# Altium PCB SD_Loger.PcbDoc
Units mm, origin at the board's own origin, x right, y up, seen from the top; angles counter-clockwise.
Board outline 30.35 x 38.75 mm, 2 copper layers (Top Layer, Bottom Layer); 36 components, 29 nets, 163 pads, 31 vias.
Unrouted connection lines stored in the file: 35.
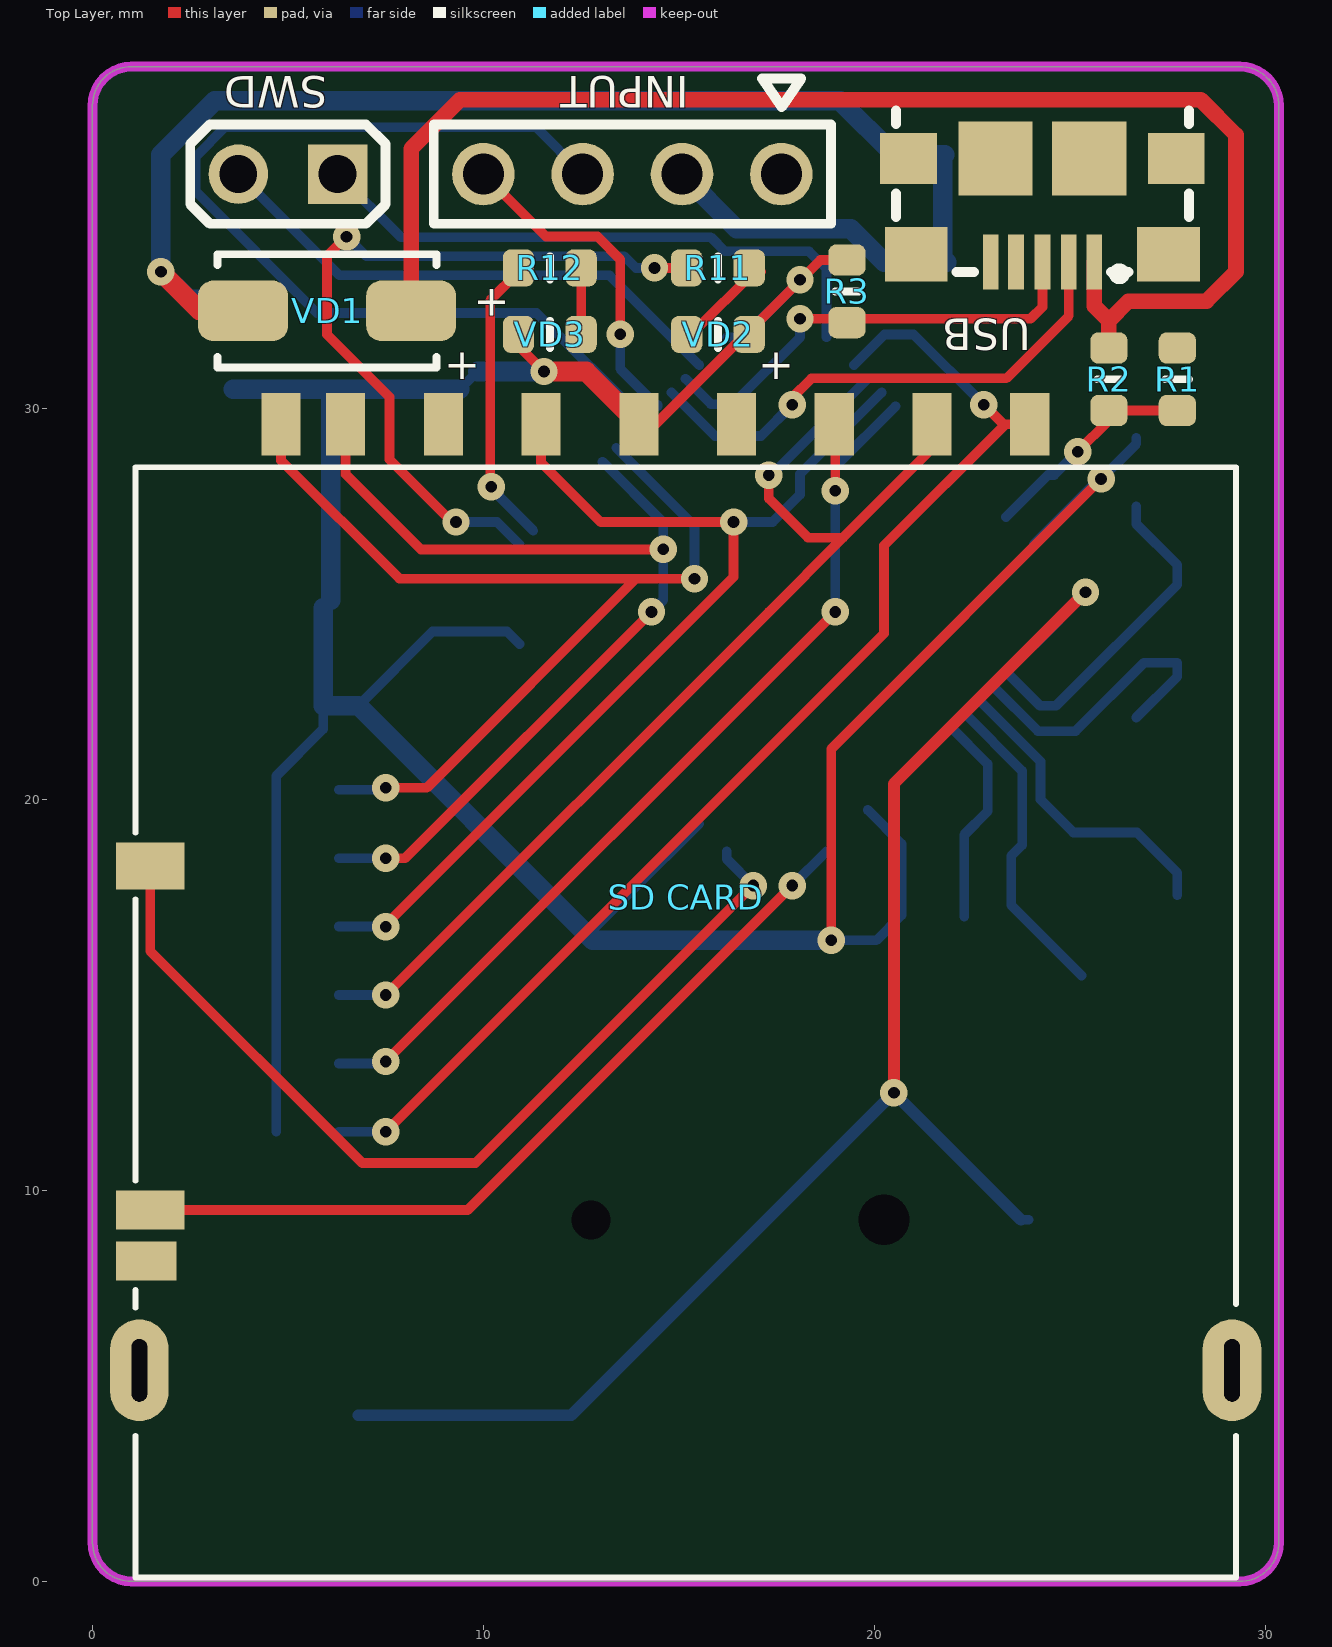
[diagram p0: Top Layer view]
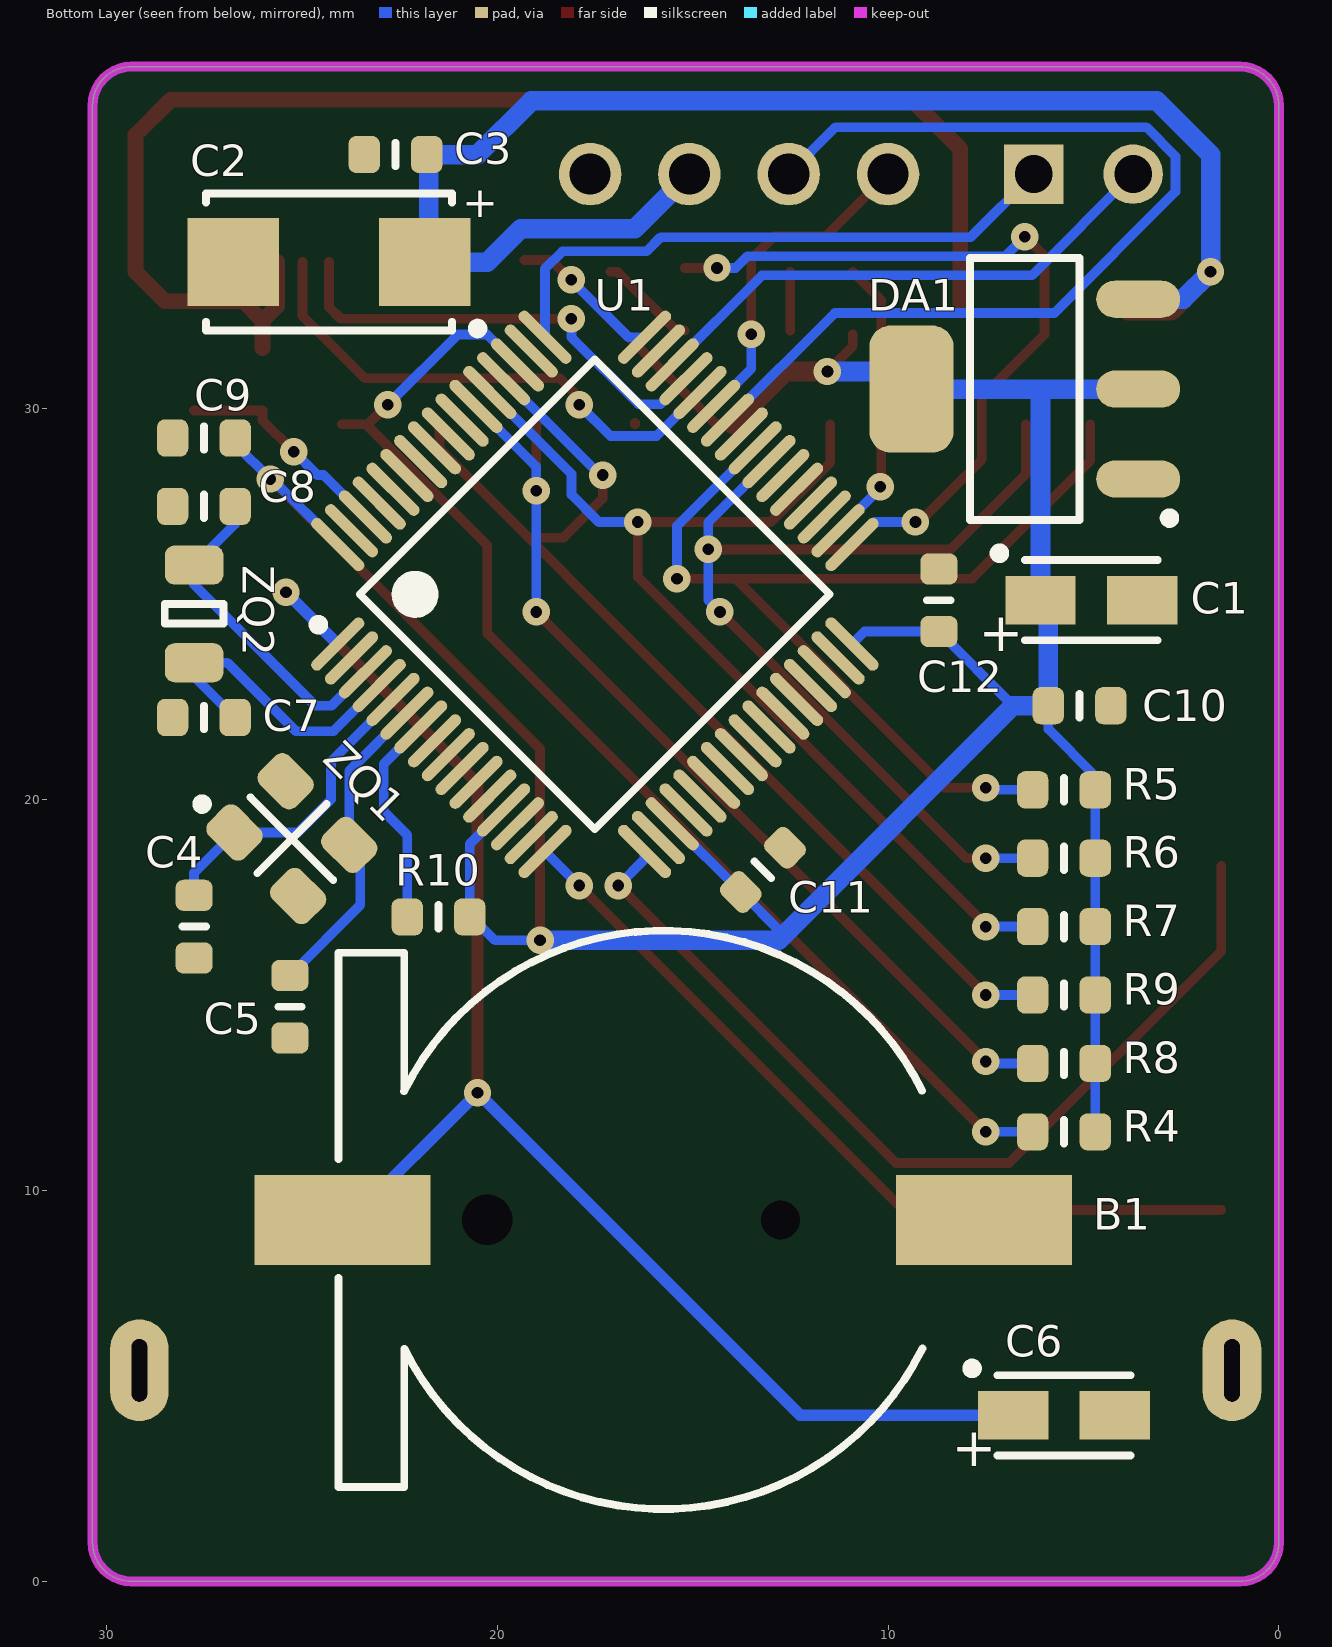
[diagram p1: Bottom Layer view, seen from below]
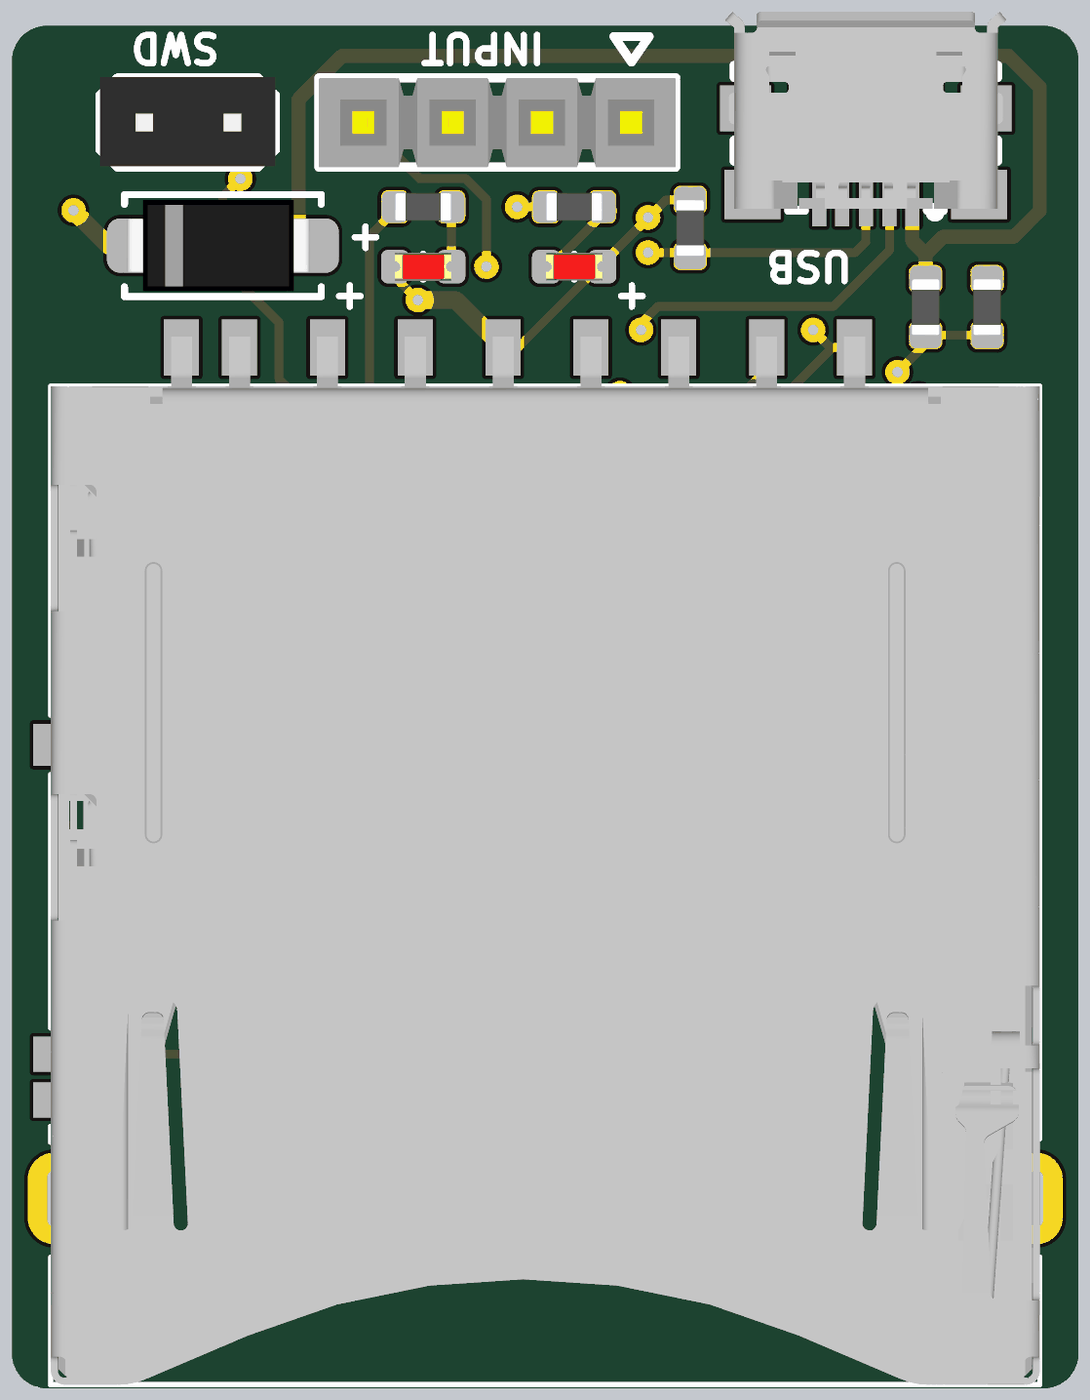
[diagram p2: 3D render of the assembled board from above, using the file's embedded part models]
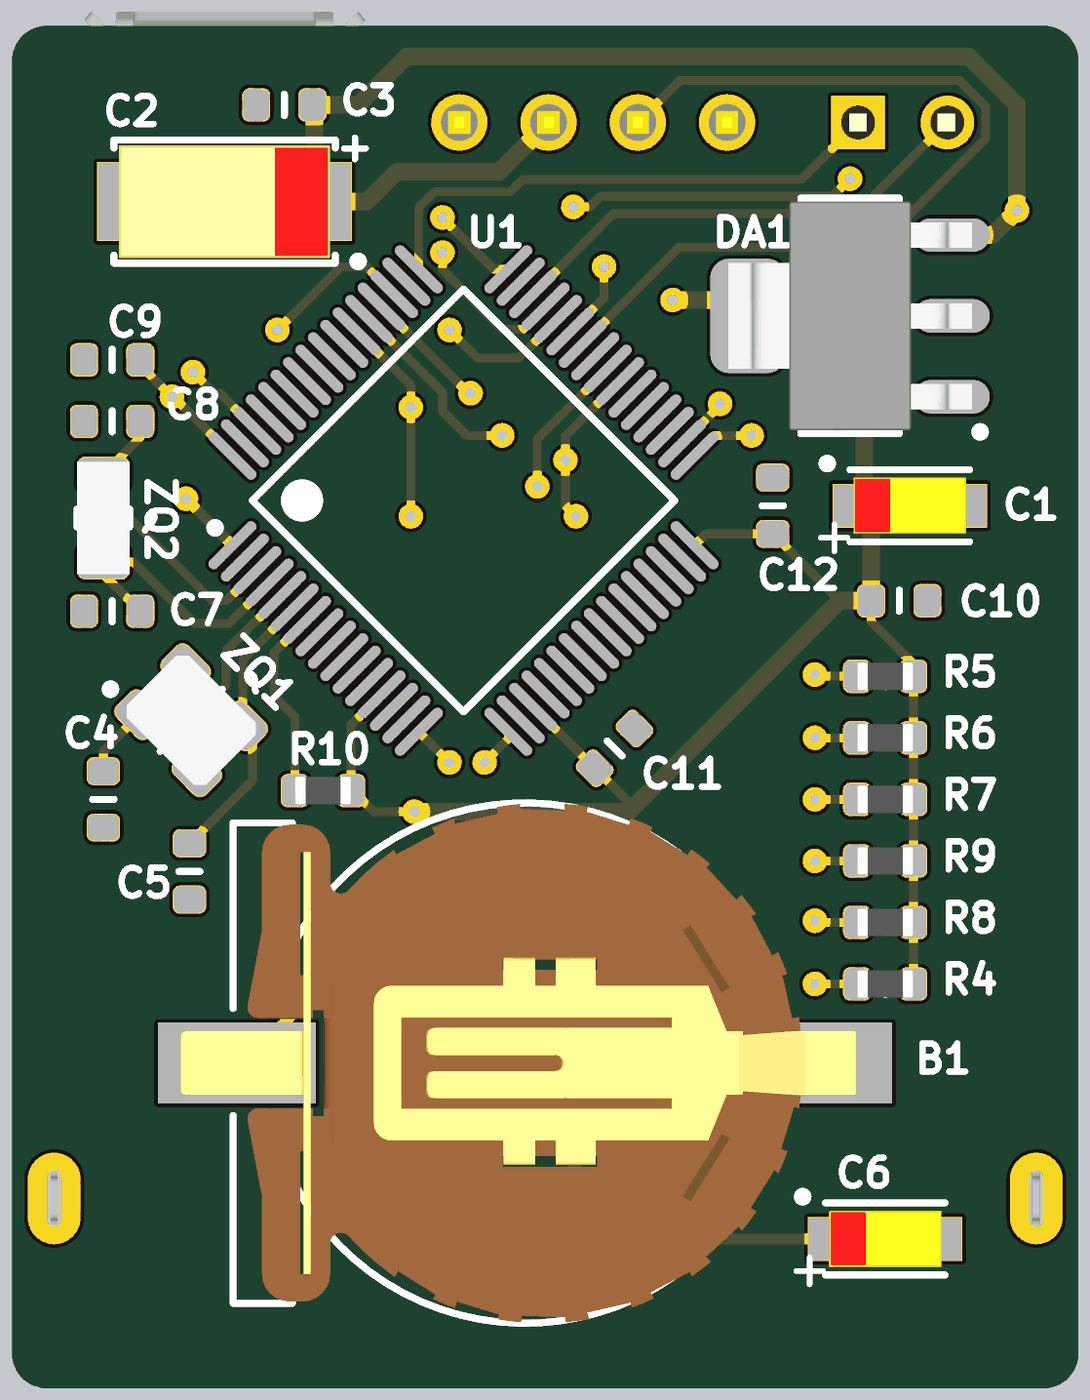
[diagram p3: 3D render of the assembled board from below, using the file's embedded part models]

## Layer stack, top to bottom
Top Solder: solder mask 0.0102, Solder Resist, Dk 3.5
Top Layer: signal copper 0.0356
Dielectric 1: dielectric 0.32, FR-4, Dk 4.8
Bottom Layer: signal copper 0.0356
Bottom Solder: solder mask 0.0102, Solder Resist, Dk 3.5

## Board outline
0,1 ccw(c1,1) 1,0 29.35,0 ccw(c29.35,1) 30.35,1 30.35,37.75 ccw(c29.35,37.75) 29.35,38.75 1,38.75 ccw(c1,37.75) 0,37.75

## Design rules (kind name [scope] priority, off if disabled: settings)
Clearance [All] p1: gap=0.2
ComponentClearance [All] p1: gap=0.05 collisioncheckmode=3 verticalgap=0.05 showdistances=FALSE
PolygonConnect [All] p1: connectstyle=Relief reliefconductorwidth=0.25 reliefentries=4 polygonreliefangle="45 Angle" airgapwidth=0.25
RoutingVias [All] p1: holewidth=0.3 width=0.7 viastyle="Through Hole" minholewidth=0.3 minwidth=0.7 maxholewidth=0.3 maxwidth=0.7
SMDNeckDown [All] p1: percent=90.000
SolderMaskExpansion [All] p1: expansion=0.102
Width [All] p1: maxlimit=1 minlimit=0.25 preferedwidth=0.25
29 further rules are at their usual default settings.

## Components (designator, comment, footprint, x,y, rotation, side; value= is the part's Value field where it differs from the comment)
B1 "CR1220" S8411-45R 15.75,9.25 r270 bottom
C1 "Tantal A 10uF/16V" "CAPMP3216X180N (TANTAL A)" 4.8,25.1 r180 bottom
C2 "Tantal C 47uF/16V" "CAPMP6033X250N (TANTAL C)" 24.3,33.75 r0 bottom
C3 "чип 0603 1uF/50V," CAPC1608X50(0603) 22.6,36.5 r180 bottom
C4 "чип 0603 10pF/50V," CAPC1608X50(0603) 27.75,16.75 r270 bottom
C5 "чип 0603 10pF/50V," CAPC1608X50(0603) 25.3,14.7 r90 bottom
C6 "Tantal A 10uF/16V" "CAPMP3216X180N (TANTAL A)" 5.5,4.25 r180 bottom
C7 "чип 0603 20pF/50V," CAPC1608X50(0603) 27.5,22.1 r180 bottom
C8 "чип 0603 20pF/50V," CAPC1608X50(0603) 27.5,27.5 r180 bottom
C9 "чип 0603 100nF/50V," CAPC1608X50(0603) 27.5,29.25 r180 bottom
C10 "чип 0603 100nF/50V," CAPC1608X50(0603) 5.1,22.4 r0 bottom
C11 "чип 0603 100nF/50V," CAPC1608X50(0603) 13.2,18.2 r315 bottom
C12 "чип 0603 100nF/50V," CAPC1608X50(0603) 8.7,25.1 r270 bottom
DA1 "AMS1117-3.3" SOT230P700X180-4N(SOT223)_NUM 6.5,30.5 r0 bottom
INPUT "DS1021-1x4" HDRV4P254_1x4 10,36 r0 top
R1 "чип 0603 10K 5%" RESC1608X45(0603) 27.75,30.75 r270 top
R2 "чип 0603 5.9K 5%" RESC1608X45(0603) 26,30.75 r90 top
R3 "чип 0603 1K 5%" RESC1608X45(0603) 19.3,33 r270 top
R4 "чип 0603 10K 5%" RESC1608X45(0603) 5.5,11.5 r180 bottom
R5 "чип 0603 10K 5%" RESC1608X45(0603) 5.5,20.25 r180 bottom
R6 "чип 0603 10K 5%" RESC1608X45(0603) 5.5,18.5 r180 bottom
R7 "чип 0603 10K 5%" RESC1608X45(0603) 5.5,16.75 r180 bottom
R8 "чип 0603 10K 5%" RESC1608X45(0603) 5.5,13.25 r180 bottom
R9 "чип 0603 10K 5%" RESC1608X45(0603) 5.5,15 r180 bottom
R10 "чип 0603 10K 5%" RESC1608X45(0603) 21.5,17 r0 bottom
R11 "чип 0603 1.5K 5%" RESC1608X45(0603) 16,33.6 r0 top
R12 "чип 0603 1.5K 5%" RESC1608X45(0603) 11.7,33.6 r0 top
"SD CARD" "Attend" "Attend 104H-TDA0-R01" 1.1,0.1 r0 top
SWD "DS1021-1x2" HEADER-2.54P-2N 5,36 r270 top
U1 "STM32F103RBT6" LQFP64_N 17.5,25.25 r135 bottom
USB "1981568-1" "USB MICRO-B" 24.3,36.4 r180 top
VD1 "(SMA)" "DIOM5226X267N (SMA)" 6,32.5 r0 top
VD2 "чип 0603 LED (RED)" LEDC1608X80N(0603)_red 16,31.9 r0 top
VD3 "чип 0603 LED (RED)" LEDC1608X80N(0603)_red 11.7,31.9 r180 top
ZQ1 "KX-7T-12.88662 12MHz(8MHz)" XTAL320X250X78-4N(ADM8) 25.25,19 r225 bottom
ZQ2 "DST310S(32.768 KHz)" XTAL320X150X90-2N(DST) 27.75,24.75 r270 bottom

## Footprints (in the part's own frame and the unit in brackets; to place one, negate y for a bottom-side part, rotate by r counter-clockwise, add the part's x,y. Pads: shape width x height; smd on the part's side, far side on the other; paste and mask are expansions set on the pad)
"Attend 104H-TDA0-R01" [mm]
  rect 1x1.6 smd: 1(20.375,29.5) 2(17.875,29.5) 3(15.375,29.5) 4(12.875,29.5) 5(10.375,29.5) 6(7.875,29.5) 7(5.375,29.5) 8(3.725,29.5) 9(22.875,29.5)
  rect 1.75x1.2 smd: 10(0.375,18.2)
  rect 1.75x1 smd: 11(0.375,9.4)
  rect 1.55x1 smd: 12(0.275,8.1)
  oval 1.5x2.6 hole 0.4 slot 1.6 at 90 deg: 13(0.1,5.3) 14(28.05,5.3)
  silkscreen extent 0,0 28.15,28.4, body extent 0,0 28.15,29.81, height 2.75
CAPC1608X50(0603) [mm]
  rrect50% 0.8x0.95 smd paste-0.025: 1(-0.8,0) 2(0.8,0)
  silkscreen extent 0,-0.3 0,0.3, body extent -0.8,-0.4 0.8,0.4, height 0.5
"CAPMP3216X180N (TANTAL A)" [mm]
  rect 1.8x1.25 smd paste-0.025: 1(-1.3,0) 2(1.3,0)
  silkscreen extent -2.48,-1.03 1.7,1.32, body extent -1.6,-0.8 1.6,0.8, height 1.8
"CAPMP6033X250N (TANTAL C)" [mm]
  rect 2.35x2.25 smd paste-0.025: 1(-2.45,0) 2(2.45,0)
  silkscreen extent -3.92,-1.75 3.15,1.82, body extent -3,-1.6 3,1.6, height 2.5
"DIOM5226X267N (SMA)" [mm]
  rrect50% 2.3x1.55 smd: A(2.15,0) C(-2.15,0)
  silkscreen extent -2.8,-1.45 2.8,1.45, body extent -2.73,-1.3 2.47,1.3, height 2.4
HDRV4P254_1x4 [mm] "PLS4"
  round 1.6 hole 1.05: 1(7.62,0) 2(5.08,0) 3(2.54,0) 4(0,0)
  silkscreen extent -1.27,-1.27 8.89,2.45, body extent -1.27,-1.27 8.89,1.27, height 8.14
HEADER-2.54P-2N [mil]
  rect 60x60 hole 38: 1(0,50)
  round 60 hole 38: 2(0,-50)
  silkscreen extent -50,-98 50,98, body extent -51,-98 49,98, height 335
LEDC1608X80N(0603)_red [mm]
  rrect50% 0.8x0.95 smd: A(0.8,0) C(-0.8,0)
  silkscreen extent 0,-0.35 0,0.35, body extent -0.81,-0.4 0.81,0.4, height 0.6
LQFP64_N [mm] "Thin QFP, 64-Leads, Body 10x10mm, Pitch 0.5mm, IPC Medium Density"
  oval 1.8x0.3 smd: 1(-5.55,3.75) 2(-5.55,3.25) 3(-5.55,2.75) 4(-5.55,2.25) 5(-5.55,1.75) 6(-5.55,1.25) 7(-5.55,0.75) 8(-5.55,0.25) 9(-5.55,-0.25) 10(-5.55,-0.75) 11(-5.55,-1.25) 12(-5.55,-1.75) 13(-5.55,-2.25) 14(-5.55,-2.75) 15(-5.55,-3.25) 16(-5.55,-3.75) 33(5.55,-3.75) 34(5.55,-3.25) 35(5.55,-2.75) 36(5.55,-2.25) 37(5.55,-1.75) 38(5.55,-1.25) 39(5.55,-0.75) 40(5.55,-0.25) 41(5.55,0.25) 42(5.55,0.75) 43(5.55,1.25) 44(5.55,1.75) 45(5.55,2.25) 46(5.55,2.75) 47(5.55,3.25) 48(5.55,3.75)
  oval 0.3x1.8 smd: 17(-3.75,-5.55) 18(-3.25,-5.55) 19(-2.75,-5.55) 20(-2.25,-5.55) 21(-1.75,-5.55) 22(-1.25,-5.55) 23(-0.75,-5.55) 24(-0.25,-5.55) 25(0.25,-5.55) 26(0.75,-5.55) 27(1.25,-5.55) 28(1.75,-5.55) 29(2.25,-5.55) 30(2.75,-5.55) 31(3.25,-5.55) 32(3.75,-5.55) 49(3.75,5.55) 50(3.25,5.55) 51(2.75,5.55) 52(2.25,5.55) 53(1.75,5.55) 54(1.25,5.55) 55(0.75,5.55) 56(0.25,5.55) 57(-0.25,5.55) 58(-0.75,5.55) 59(-1.25,5.55) 60(-1.75,5.55) 61(-2.25,5.55) 62(-2.75,5.55) 63(-3.25,5.55) 64(-3.75,5.55)
  silkscreen extent -5.67,-4.25 4.25,4.57, body extent -5,-5 5,5, height 1.6
RESC1608X45(0603) [mm]
  rrect50% 0.8x0.95 smd paste-0.025: 1(-0.8,0) 2(0.8,0)
  silkscreen extent 0,-0.3 0,0.3, body extent -0.8,-0.4 0.8,0.4, height 0.5
S8411-45R [mm]
  rect 2.3x4.5 smd: 1(0,-8.2) 2(0,8.2)
  round 1.2 hole 1.3 unplated: ""(0,-4.5)
  round 0.9 hole 1 unplated: ""(0,3)
  silkscreen extent -7.4,-8.31 7.4,6.63, body extent -7.37,-9.79 7.37,9.41, height 4.25
SOT230P700X180-4N(SOT223)_NUM [mm]
  oval 2.15x0.95 smd: 1(-2.9,2.3) 2(-2.9,0) 3(-2.9,-2.3)
  rrect50% 2.15x3.25 smd: 4(2.9,0)
  silkscreen extent -3.82,-3.35 1.4,3.42, body extent -3.47,-3.25 3.47,3.25, height 1.64
"USB MICRO-B" [mm] "Micro USB B Tyco  1981568-1"
  rect 0.4x1.4 smd: 1(-1.325,2.65) 2(-0.675,2.65) 3(0,2.65) 4(0.675,2.65) 5(1.325,2.65)
  rect 1.45x1.3 smd: SHLD(-3.425,0) SHLD(3.425,0)
  rect 1.6x1.4 smd: SHLD(-3.225,2.45) SHLD(3.225,2.45)
  rect 1.9x1.9 smd: SHLD(-1.2,0) SHLD(1.2,0)
  silkscreen extent -3.75,-1.23 3.75,3.12, body extent -4,-2.75 4,2.85, height 2.79
XTAL320X150X90-2N(DST) [mm]
  rrect50% 1x1.5 smd paste-0.025 mask+0.1: 1(-1.25,0) 2(1.25,0)
  silkscreen extent -0.25,-0.75 0.25,0.75, body extent -1.6,-0.75 1.6,0.75, height 0.9
XTAL320X250X78-4N(ADM8) [mm]
  rrect50% 1.3x1.05 smd paste-0.025 mask+0.1: 1(-1.15,-0.925) 2(1.15,-0.925) 3(1.15,0.925) 4(-1.15,0.925)
  silkscreen extent -2.37,-1.25 1.5,1.25, body extent -1.6,-1.25 1.6,1.25, height 0.7

## Part data
B1: "CR-1220 Battery Holder"
C1 C6: library part "Tantalum Size A", "Tantalum Size A"
C2: library part "Tantalum Size C", "Tantalum Size C"
C3 C4 C5 C7 C8 C9 C10 C11 C12: library part C0603, "C0603"
DA1: library part AMS1117, "AMS1117 Voltage Regulation"
INPUT: library part Header-2.54P-4N, "IDC разъем 4 контактов. Шаг 2.54мм"
R1 R2 R3 R4 R5 R6 R7 R8 R9 R10 R11 R12: library part R0603, "R0603"
"SD CARD": library part "MicroSD Attend", "Attend 104H-TDA0-R01"
SWD: library part Header-2.54P-2N, "IDC разъем 2 контакта"
U1: "STM32 ARM-based 32-bit MCU with 128 Kbytes Flash, 64-pin LQFP, Industrial Temperature"
USB: library part "USB Micro-B Tyco", "USB micro type A. SMT (TE 1981568-1)"
VD1: library part "SMA Standart", "SMA General Pupose Diode"
VD2 VD3: library part "LED 0603", "LED 0603"
ZQ1: library part "XTAL, SMD, 3.2mm x 2.5mm, 4 pads", "KX-7T series"
ZQ2: library part "XTAL, SMD, 3.2mm x 1.5mm, 2 pads", "DST310S"

## Via types
v1: diameter 0.7, hole 0.3, Top Layer to Bottom Layer, 31 vias

## Nets (pads, with @x,y where several pads share a name; then routed paths per layer and width w, separated by ;. In a path a pad name is that pad's centre, name@x,y a point inside that pad or via, vN(x,y) a via of type N, cw(c..) or ccw(c..) an arc to the next point about the centre after c; other vN are vias at no path point)
3.3V: "SD CARD.4" C1.1 C9.2 C10.2 C11.2 C12.2 DA1.2 DA1.4 R3.1 R4.2 R5.2 R6.2 R7.2 R8.2 R9.2 R10.1 U1.13 U1.19 U1.32 U1.48 U1.64 VD2.A VD3.A | length 89.7
  Top Layer w0.25: VD3.A 10.9,31.6 v1(11.55,30.95) ; 13.975,29.6 14.4,29.6 16.8,32 16.817,32 v1@18.1,33.283 ; v1(18.1,33.3) v1@18.1,33.283 ; v1(18.9,16.4) 18.9,21.3 v1(25.8,28.2) ; R3.1 18.617,33.8 v1@18.1,33.283
  Top Layer w0.5: v1(11.55,30.95) 12.625,30.95 13.975,29.6
  Bottom Layer w0.25: R4.2 R8.2 R9.2 R6.2 R5.2 4.7,20.6 5.9,21.8 C10.2 ; C1.1@5.9,24.9 C1.1 ; 6.8,22.4 C12.2 10.601,24.3 U1.32 ; DA1.4 DA1.4@9.85,30.95 ; 12.6,16.6 12.731,16.6 C11.2 15.512,19.381 U1.19 ; U1.48 16.644,31.826 18.1,33.283 v1(18.1,33.3) ; v1(18.9,16.4) 20.05,16.4 20.7,17.05 20.7,18.868 U1.13 ; U1.64 25.753,28.2 v1(25.8,28.2) 26.7,29.1 C9.2
  Bottom Layer w0.5: DA1.2 6.1,30.5 ; C1.1@5.9,24.9 C10.2 6.8,22.4 12.6,16.6 12.8,16.4 v1(18.9,16.4) ; C1.1 6.1,30.5 ; DA1.4 6.1,30.5 ; DA1.4@9.85,30.95 v1(11.55,30.95)
CD/DATA3: "SD CARD.1" R9.1 U1.52 | length 28.1
  Top Layer w0.25: v1(7.5,15) 17.3,24.8 19.2,26.7 ; v1(17.3,28.3) 17.3,27.7 18.3,26.7 19.2,26.7 ; 21.475,29.6 21.475,28.975 19.2,26.7
  Bottom Layer w0.25: R9.1 v1(7.5,15) ; v1(17.3,28.3) 17.368,28.3 U1.52
D+: R3.2 U1.45 USB.3 | length 11.9
  Top Layer w0.25: v1(18.1,32.3) 24,32.3 24.3,32.6 USB.3
  Bottom Layer w0.25: U1.45 15.818,30.114 16.389,30.114 18.1,31.825 v1(18.1,32.3)
D-: U1.44 USB.2 | length 13.4
  Top Layer w0.25: v1(17.9,30.1) 17.9,30.285 18.39,30.775 23.375,30.775 24.975,32.375 USB.2
  Bottom Layer w0.25: U1.44 15.925,29.3 17.1,29.3 v1(17.9,30.1)
DATA0: "SD CARD.7" R6.1 U1.39 | length 25.4
  Top Layer w0.25: 6.475,29.6 6.475,28.325 8.4,26.4 v1(14.6,26.4) ; v1(7.5,18.5) 8,18.5 v1(14.3,24.8)
  Bottom Layer w0.25: R6.1 v1(7.5,18.5) ; U1.39 14.6,27.089 v1(14.6,26.4) 14.6,25.1 v1(14.3,24.8)
DATA1: "SD CARD.8" R5.1 U1.40 | length 26.8
  Top Layer w0.25: 4.825,29.6 4.825,28.675 7.85,25.65 13.9,25.65 ; v1(7.5,20.3) 8.55,20.3 13.9,25.65 ; v1(15.4,25.65) 13.9,25.65
  Bottom Layer w0.25: R5.1 7.45,20.25 v1(7.5,20.3) ; U1.40 15.4,26.996 v1(15.4,25.65)
DATA2: "SD CARD.9" R4.1 U1.51 | length 32.3
  Top Layer w0.25: v1(7.5,11.5) 20.25,24.25 20.25,26.5 23.35,29.6 23.975,29.6 23.3,29.6 v1(22.8,30.1)
  Bottom Layer w0.25: R4.1 v1(7.5,11.5) ; U1.51 20.261,31.9 21,31.9 v1(22.8,30.1)
GND: "SD CARD.3" "SD CARD.6" "SD CARD.12" "SD CARD.13" "SD CARD.14" B1.2 C1.2 C2.2 C3.1 C4.2 C5.1 C6.2 C7.1 C8.1 C9.1 C10.1 C11.1 C12.1 DA1.1 INPUT.1 R1.1 U1.12 U1.18 U1.31 U1.47 U1.60 U1.63 USB.5 USB.SHLD ZQ1.2 ZQ1.4 | length 0
  Top Layer w0.25: 16.475,29.6 16.475,29.63
NetB1_1: B1.1 C6.1 U1.1 | length 38.6
  Top Layer w0.3: v1(20.5,12.5) 20.5,20.401 v1(25.4,25.301)
  Bottom Layer w0.25: B1.1@23.75,9.25 B1.1
  Bottom Layer w0.3: C6.1 12.25,4.25 v1(20.5,12.5) B1.1@23.75,9.25 ; U1.1 v1(25.4,25.301)
NetC4_1: C4.1 U1.5 ZQ1.1 | length 8.1
  Bottom Layer w0.25: U1.5 24.25,20.975 24.25,20 25.091,19.159 ZQ1.1 27.75,18.126 C4.1
NetC5_2: C5.2 U1.6 ZQ1.3 | length 8.2
  Bottom Layer w0.25: U1.6 23.783,20.735 ZQ1.3 23.5,18.558 23.5,17.3 C5.2
NetC7_2: C7.2 U1.4 ZQ2.2 | length 7.8
  Bottom Layer w0.25: U1.4 24.182,21.75 25.15,21.75 26.9,23.5 ZQ2.2 27.75,23.15 C7.2
NetC8_2: C8.2 U1.3 ZQ2.1 | length 8.5
  Bottom Layer w0.25: U1.3 24.239,22.4 24.65,22.4 27.75,25.5 ZQ2.1 26.7,27.05 C8.2
NetINPUT_3: INPUT.3 U1.42 | length 25.5
  Bottom Layer w0.25: INPUT.3 11.34,37.2 3.393,37.2 2.643,36.45 2.643,35.55 5.743,32.45 11.361,32.45 U1.42
NetINPUT_4: INPUT.4 U1.43 | length 8.7
  Top Layer w0.25: INPUT.4 11.6,34.4 12.917,34.4 13.5,33.817 v1(13.5,31.9)
  Bottom Layer w0.25: v1@13.5,32 13.5,31.018 U1.43 U1.43@14.459,30.094
NetR1_2: R1.2 R2.1 U1.62 | length 5.7
  Top Layer w0.25: v1(25.2,28.9) 26,29.7 R2.1 R1.2
  Bottom Layer w0.25: U1.62 24.439,28.3 24.6,28.3 v1(25.2,28.9)
NetR8_1: "SD CARD.2" R8.1 U1.54 | length 25.1
  Top Layer w0.25: v1(7.5,13.3) v1(19,24.8) ; 18.975,29.6 19,29.575 v1(19,27.9)
  Bottom Layer w0.25: R8.1 7.45,13.25 v1(7.5,13.3) ; v1(19,24.8) v1(19,27.9) 19,28.518 U1.54
NetR10_2: R10.2 U1.7 | length 5.5
  Bottom Layer w0.25: U1.7 22.9,20.911 22.9,19.7 22.3,19.1 R10.2
NetR11_1: R11.1 U1.33 | length 19.8
  Top Layer w0.25: v1(6.5,34.4) 6,33.9 6,31.9 7.6,30.3 7.6,28.7 9.2,27.1 v1(9.3,27.1) ; v1(14.375,33.6) R11.1
  Bottom Layer w0.25: v1(6.5,34.4) 7,33.9 13.6,33.9 13.9,33.6 v1(14.375,33.6) ; v1(9.3,27.1) 10.347,27.1 U1.33
NetR11_2: R11.2 VD2.C | length 2.5
  Top Layer w0.25: VD2.C@15.2,32 15.417,32 16.917,33.5 R11.2@17.1,33.5
NetR12_1: R12.1 U1.34 | length 7.4
  Top Layer w0.25: v1(10.2,28) 10.175,28.025 10.175,32.775 R12.1@10.9,33.5
  Bottom Layer w0.25: v1(10.2,28) 10.2,27.954 U1.34
NetR12_2: R12.2 VD3.C | length 1.5
  Top Layer w0.25: VD3.C@12.5,32 R12.2@12.5,33.5
"NetSD CARD_10": "SD CARD.10" U1.17 | length 23.9
  Top Layer w0.25: 1.475,18.3 1.475,16.125 6.9,10.7 9.8,10.7 v1(16.9,17.8)
  Bottom Layer w0.25: U1.17 16.227,18.473 v1(16.9,17.8)
"NetSD CARD_11": "SD CARD.11" U1.16 | length 21.1
  Top Layer w0.25: 1.475,9.5 9.6,9.5 v1(17.9,17.8)
  Bottom Layer w0.25: v1(17.9,17.8) U1.16@18.773,18.673
NetSWD_1: SWD.1 U1.49 | length 15.3
  Bottom Layer w0.25: SWD.1 7.886,34.384 15.816,34.384 16.175,34.025 18.329,34.025 18.775,33.58 18.775,32.02 18.773,32.018 U1.49 U1.49
NetSWD_2: SWD.2 U1.46 | length 13.8
  Bottom Layer w0.25: SWD.2 6.319,33.411 13.228,33.411 U1.46
SCLK: "SD CARD.5" R7.1 U1.53 | length 27.2
  Top Layer w0.25: v1(7.5,16.75) 7.5,16.795 16.4,25.695 v1(16.4,27.1) 13,27.1 11.475,28.625 11.475,29.6
  Bottom Layer w0.25: R7.1 v1(7.5,16.75) ; v1(16.4,27.1) 17.4,27.1 18.1,27.8 18.1,28.325 U1.53
VBUS: R2.2 USB.1 VD1.A | length 35.8
  Top Layer w0.4: VD1.A 8.15,36.65 9.4,37.9 28.35,37.9 29.25,37 29.25,33.5 28.5,32.75 26.5,32.75 26,32.25 ; USB.1 25.625,32.625 26,32.25 ; R2.2 26,32.25
VIN: C2.1 C3.2 DA1.3 INPUT.2 VD1.C | length 39.3
  Top Layer w0.5: v1(1.75,33.5) 2.75,32.5 VD1.C
  Bottom Layer w0.25: C2.1@21.75,33.85 C2.1
  Bottom Layer w0.5: DA1.3 2.45,32.8 v1(1.75,33.5) 1.75,36.5 3.125,37.875 19.125,37.875 20.5,36.5 C3.2 ; INPUT.2 16.48,34.6 19.4,34.6 20.25,33.75 C2.1 ; C2.1@21.75,33.85 C3.2@21.75,36.5
pads on no net: B1. U1.2 U1.8 U1.9 U1.10 U1.11 U1.14 U1.15 U1.20 U1.21 U1.22 U1.23 U1.24 U1.25 U1.26 U1.27 U1.28 U1.29 U1.30 U1.35 U1.36 U1.37 U1.38 U1.41 U1.50 U1.55 U1.56 U1.57 U1.58 U1.59 U1.61 USB.4

## Keep-outs
Keep-Out Layer:
  the board outline again, w0.254

## Text inside footprints (layer, text, board x,y; h text height)
C1: Mechanical 1 "+" at 7.675,23.8 h1; Bottom Overlay "+" at 7.675,23.8 h1
C2: Mechanical 1 "+" at 19.975,35.575 h1 r180; Bottom Overlay "+" at 19.975,35.575 h0.8 r180
C6: Mechanical 1 "+" at 8.375,2.95 h1; Bottom Overlay "+" at 8.375,2.95 h1
INPUT: Mechanical 1 "1" at 18.49,37.56 h1; Mechanical 1 "4" at 9.38,37.57 h1
USB: Mechanical 1 "PCB EDGE" at 27.75,37.75 h0.4 r180
VD1: Top Overlay "+" at 9,30.75 h0.8; Mechanical 1 "+" at 8.7,30.35 h1
VD2: Top Overlay "+" at 17.025,30.75 h0.8; Mechanical 1 "+" at 17.025,30.75 h1
VD3: Top Overlay "+" at 10.675,33.05 h0.8 r180; Mechanical 1 "+" at 10.675,33.05 h1 r180